# Altium PCB Slave_DA.PcbDoc
Units mil, origin at the board's own origin, x right, y up, seen from the top; angles counter-clockwise.
Board outline 6000 x 4000 mil, 2 copper layers (Top Layer, Bottom Layer); 51 components, 40 nets, 164 pads, 22 vias.
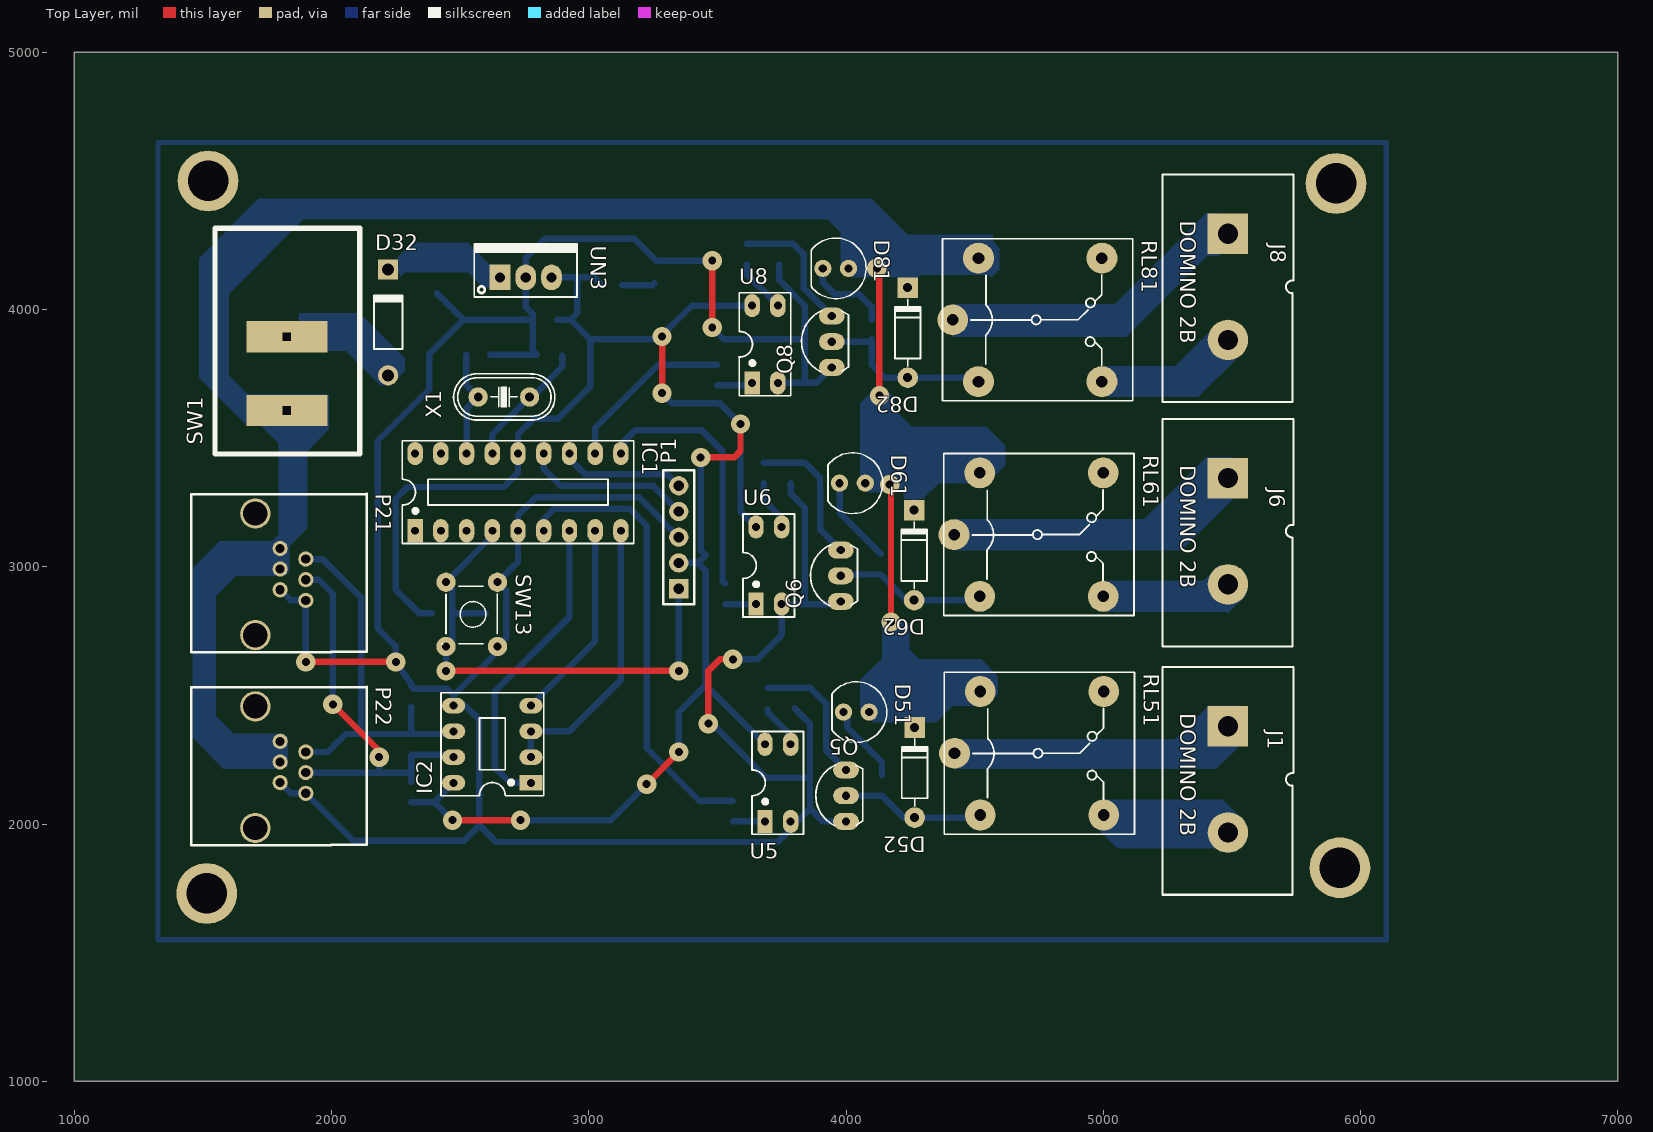
[diagram p0: Top Layer view]
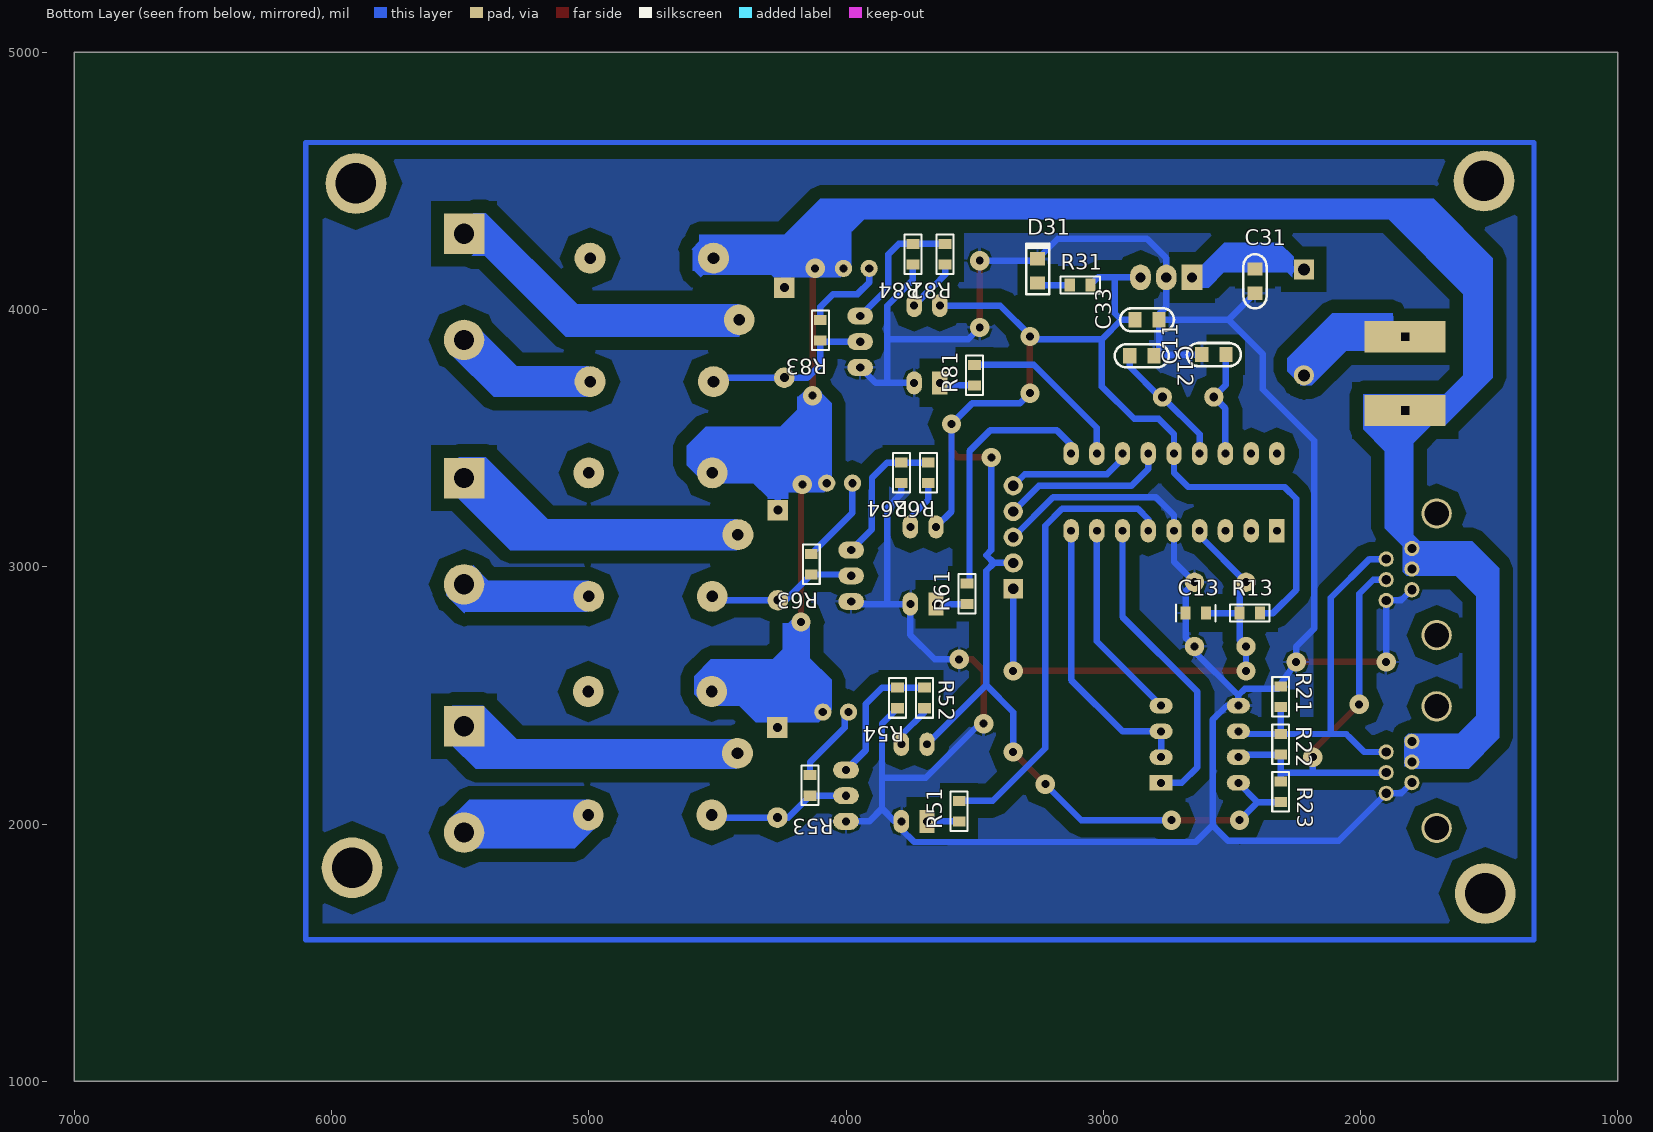
[diagram p1: Bottom Layer view, seen from below]
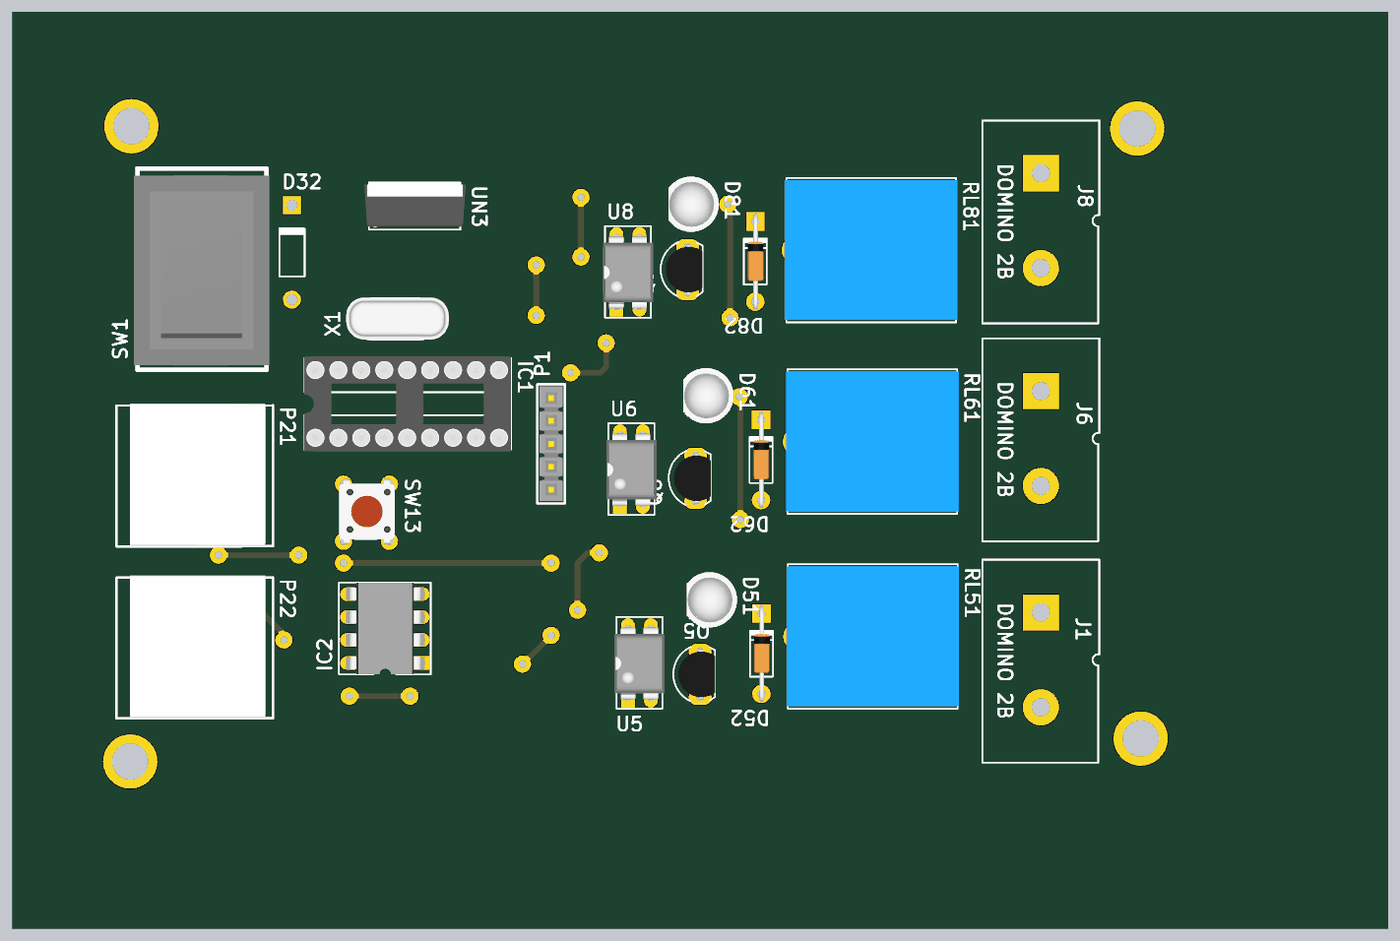
[diagram p2: 3D render of the assembled board from above, using the file's embedded part models]
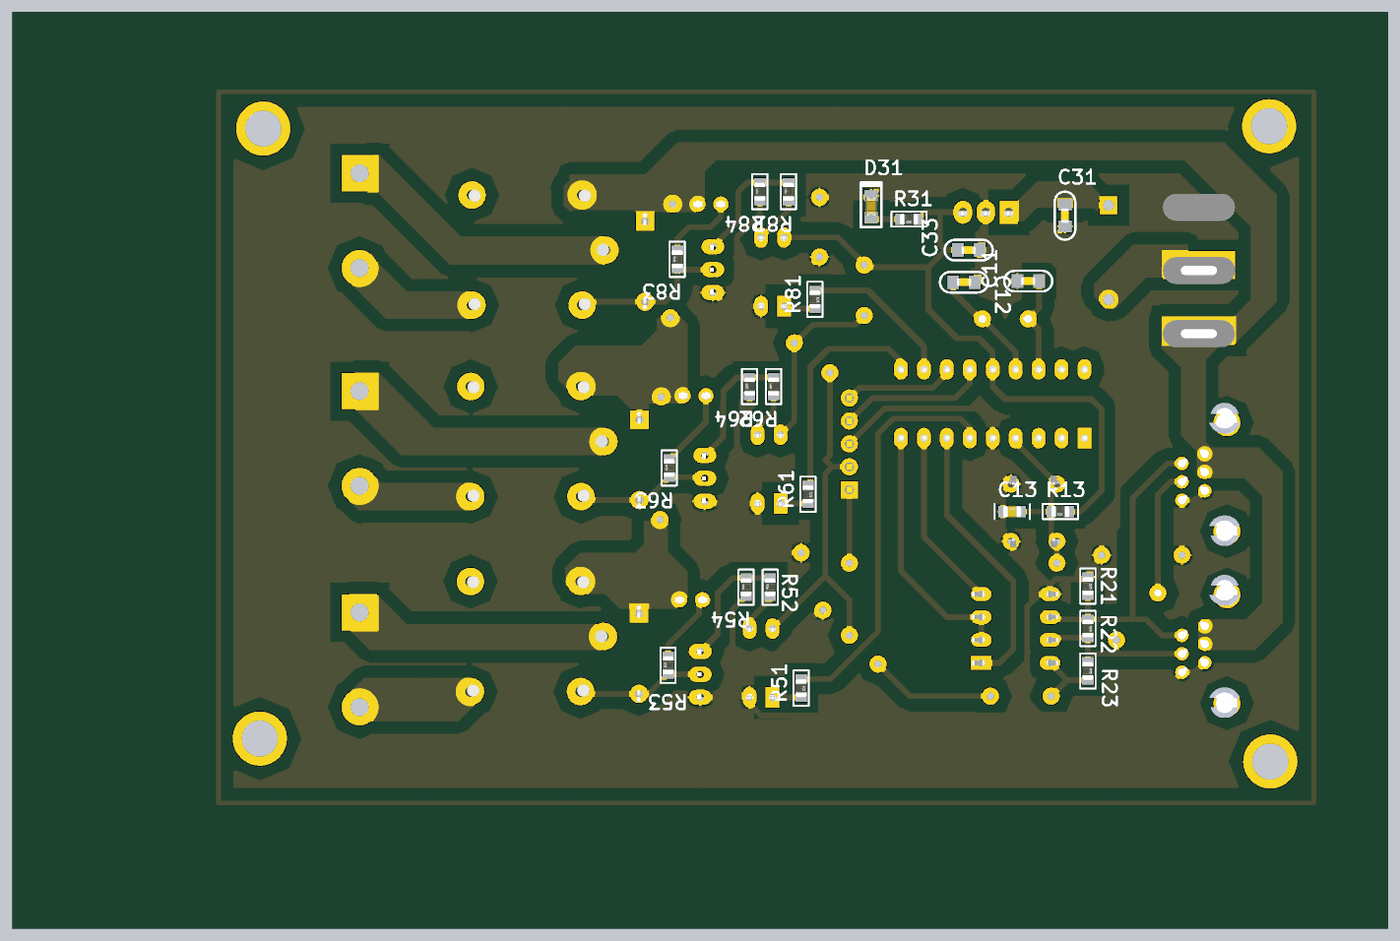
[diagram p3: 3D render of the assembled board from below, using the file's embedded part models]

## Layer stack, top to bottom
Top Solder: solder mask 0.4, Solder Resist, Dk 3.5
Top Layer: signal copper 1.4
Dielectric 1: dielectric 12.6, FR-4, Dk 4.8
Bottom Layer: signal copper 1.4
Bottom Solder: solder mask 0.4, Solder Resist, Dk 3.5

## Board outline
1000,1000 7000,1000 7000,5000 1000,5000

## Design rules (kind name [scope] priority, off if disabled: settings)
Clearance [All] p1: gap=50
PolygonConnect [All] p1: connectstyle=Relief reliefconductorwidth=10 reliefentries=4 polygonreliefangle="90 Angle" airgapwidth=10
RoutingVias [All] p1: holewidth=28 width=50 viastyle="Through Hole" minholewidth=28 minwidth=50 maxholewidth=28 maxwidth=50
SolderMaskExpansion [All] p1: expansion=4
Width [All] p1: maxlimit=30 minlimit=15 preferedwidth=20
30 further rules are at their usual default settings.

## Components (designator, comment, footprint, x,y, rotation, side; value= is the part's Value field where it differs from the comment)
C11 "Cap Non-pol" C-NP-0805 2570,3825 r0 bottom
C12 "Cap Non-pol" C-NP-0805 2850,3820 r180 bottom
C13 "Capacitor Ceramic" CAP_SMD_0805 2640,2820 r180 bottom
C31 "Cap Non-pol" C-NP-0805 2410,4110 r90 bottom
C33 "Cap Non-pol" C-NP-0805 2830,3960 r0 bottom
D31 "LED" "LED-0805 RED" 3255,4150 r90 bottom
D32 "Diode 1N4007" DO-41 2220,3950 r90 top
D51 "LED" "LED-0 5mm RED" 4040,2435 r270 top
D52 "1N4007" D1A 4266.93,2025 r270 top
D61 "LED" "LED-0 5mm RED" 4025,3325 r270 top
D62 "1N4007" D1A 4265,2870 r270 top
D81 "LED" "LED-0 5mm RED" 3960,4160 r270 top
D82 "1N4007" D1A 4240,3735 r270 top
IC1 "PIC16F628A" DIP18/W0.3 2325,3140 r0 top
IC2 "MAX485" DIP8/W0.3 2775,2160 r90 top
J1 "CON.Domino2" "DOMINO 2B" 5485,2380 r270 top
J6 "CON.Domino2" "DOMINO 2B" 5485,3345 r270 top
J8 "CON.Domino2" "DOMINO 2B" 5485,4295 r270 top
P1 "Header 5" "Header 5" 3350,2915 r90 top
P21 "Header 8" RJ11 1900,3030 r270 top
P22 "Header 8" RJ11 1900,2280 r270 top
Q5 "C1815" QTO-92 4000,2110 r90 top
Q6 "C1815" QTO-92 3980,2965 r90 top
Q8 "C1815" QTO-92 3945,3875 r90 top
R13 "RES_SMD_0805" "DIEN TRO 0805" 2430,2820 r180 bottom
R21 "RES_SMD_0805" "DIEN TRO 0805" 2310,2495 r90 bottom
R22 "RES_SMD_0805" "DIEN TRO 0805" 2310,2310 r90 bottom
R23 "RES_SMD_0805" "DIEN TRO 0805" 2310,2125 r90 bottom
R31 "RES_SMD_0805" "DIEN TRO 0805" 3090,4095 r180 bottom
R51 "RES_SMD_0805" "DIEN TRO 0805" 3560,2050 r90 bottom
R52 "RES_SMD_0805" "DIEN TRO 0805" 3695,2490 r270 bottom
R53 "RES_SMD_0805" "DIEN TRO 0805" 4140,2150 r270 bottom
R54 "RES_SMD_0805" "DIEN TRO 0805" 3800,2490 r270 bottom
R61 "RES_SMD_0805" "DIEN TRO 0805" 3530,2895 r90 bottom
R62 "RES_SMD_0805" "DIEN TRO 0805" 3680,3365 r270 bottom
R63 "RES_SMD_0805" "DIEN TRO 0805" 4135,3010 r270 bottom
R64 "RES_SMD_0805" "DIEN TRO 0805" 3785,3365 r270 bottom
R81 "RES_SMD_0805" "DIEN TRO 0805" 3500,3745 r90 bottom
R82 "RES_SMD_0805" "DIEN TRO 0805" 3615,4215 r270 bottom
R83 "RES_SMD_0805" "DIEN TRO 0805" 4100,3920 r270 bottom
R84 "RES_SMD_0805" "DIEN TRO 0805" 3740,4215 r270 bottom
RL51 "Relay 10A/12V" RL_SPDT_10A 4421.93,2275 r0 top
RL61 "Relay 10A/12V" RL_SPDT_10A 4420,3125 r0 top
RL81 "Relay 10A/12V" RL_SPDT_10A 4415,3960 r0 top
SW1 "SW_BapBenh" SW_Bapbenh 1830,3635 r0 top
SW13 "SW7" SW4 2645,2940 r270 top
U5 "TLP521-1" DIP4/W0.3 3685,2010 r0 top
U6 "TLP521-1" DIP4/W0.3 3650,2855 r0 top
U8 "TLP521-1" DIP4/W0.3 3635,3715 r0 top
UN3 "L78M05CP" QTO-220 2655,4125 r0 top
X1 "20Mhz" XT2 2670,3660 r180 top

## Footprints (in the part's own frame and the unit in brackets; to place one, negate y for a bottom-side part, rotate by r counter-clockwise, add the part's x,y. Pads: shape width x height; smd on the part's side, far side on the other; paste and mask are expansions set on the pad)
C-NP-0805 [mm] "Chip Capacitor; Non-polarized; Body 2.0 x 1.3 mm (LxW typ) [2012]"
  rect 1.3x1.5 smd: 1(-1.194,0) 2(1.194,0)
  silkscreen extent -2.67,-1.14 2.66,1.14, body extent -0.8,-0.43 0.8,0.43, height 0.79
CAP_SMD_0805 [mil] "Chip Resistor; Body 2.0 x 1.3 mm (LxW typ)"
  rect 39.37x50 smd: 1(-40,0) 2(40,0)
  silkscreen extent -77,-33 77,33, body extent -39,-25 39,25, height 31
D1A [mil] "Diode 1A, W 100mil, L 350mil"
  round 80 hole 35: 1(0,0)
  rect 80x80 hole 35: 2(-350,0)
  silkscreen extent -305,-50 -45,50, body extent -386,-33 34,36, height 84
"DIEN TRO 0805" [mil] "Chip Resistor; Body 2.0 x 1.3 mm (LxW typ)"
  rect 39.37x50 smd: 1(-40,0) 2(40,0)
  silkscreen extent -77,-33 77,33, body extent -39,-25 39,25, height 31
DIP4/W0.3 [mil] "4 PIN, W 300mil, Pin to pin 100mil"
  rect 60x90 hole 31: 1(0,0)
  oval 60x90 hole 31: 2(100,0) 3(100,300) 4(0,300)
  silkscreen extent -50,-50 150,350, body extent -59,-10 159,305, height 170
DIP8/W0.3 [mil] "8 PIN, W 300mil, Pin to pin 100mil"
  rect 60x90 hole 31: 1(0,0)
  oval 60x90 hole 31: 2(100,0) 3(200,0) 4(300,0) 5(300,300) 6(200,300) 7(100,300) 8(0,300)
  silkscreen extent -50,-50 350,350, body extent -50,-40 350,336, height 201
DIP18/W0.3 [mil] "18 PIN, W 300mil, Pin to pin 100mil"
  rect 60x90 hole 31: 1(0,0)
  oval 60x90 hole 31: 2(100,0) 3(200,0) 4(300,0) 5(400,0) 6(500,0) 7(600,0) 8(700,0) 9(800,0) 10(800,300) 11(700,300) 12(600,300) 13(500,300) 14(400,300) 15(300,300) 16(200,300) 17(100,300) 18(0,300)
  silkscreen extent -50,-50 850,350, body extent -51,-57 849,356, height 119
DO-41 [mm] "Diode, Axial; Body 5.2 x 2.7 mm (LxDia. max), Lead Dia. 0.86 mm (max)"
  round 2 hole 1.2: 1(-5.23,0)
  rect 2x2 hole 1.2: 2(5.23,0)
  silkscreen extent -2.65,-1.4 2.75,1.4
"DOMINO 2B" [mm]
  rect 4x4 hole 2: 1(0,0)
  round 4 hole 2: 2(10.5,0)
  silkscreen extent -5.84,-6.48 16.64,6.48
"Header 5" [mil] "Connector; Header; 5 Position; Solder Pad 35mil"
  rect 75x75 hole 40: 1(0,0)
  round 75 hole 40: 2(100,0) 3(200,0) 4(300,0) 5(400,0)
  silkscreen extent -60,-60 460,60, body extent -50,-50 450,50, height 83
"LED-0 5mm RED" [mil] "Typical LED; RED; 2 Leads; Solder Pad 35mil"
  round 67 hole 32: 1(0,50) 2(0,-50)
  silkscreen extent -118,-96 118,118, body extent -118,-96 119,117, height 345
"LED-0805 RED" [mm] "Chip LED; RED; Body 2.0 x 1.3 mm (LxW typ) [2012]"
  rect 1.3x1.5 smd: 1(-1.204,0) 2(1.204,0)
  silkscreen extent -2.29,-1.14 2.67,1.14, body extent -1.01,-0.63 1.01,0.62, height 1.1
QTO-92 [mil] "TO-92"
  oval 66x100 hole 32: 1(-100,0) 2(0,0) 3(100,0)
  silkscreen extent -117,-65 120,118, body extent -109,-66 109,95, height 245
QTO-220 [mil] "TO-220 - 1-2-3"
  rect 80x100 hole 39: 1(0,0)
  oval 80x100 hole 39: 2(100,0) 3(200,0)
  silkscreen extent -100,-76 300,130, body extent -119,-64 322,121, height 755
RJ11 [mm] "DIP 20, 20 PIN, W 300mil, Pin to pin 100mil"
  round 1.5 hole 0.9: 1(0,0) 2(2.04,0) 3(4.08,0) 4(-1.05,-2.53) 5(0.99,-2.53) 6(3.03,-2.53)
  round 3 hole 2.4: 7(-4.5,-4.98) 8(7.51,-4.98)
  silkscreen extent -6.43,-11.3 9.2,6.03, body extent -6.71,-9.8 9.11,5.19, height 12.87
RL_SPDT_10A [mil] "Relay SPDT, 5 pin, 10A,W 650mil, L 800mil, H 800mil"
  round 120 hole 45: 1(0,0) 2(580,240) 3(580,-240) 4(100,-240) 5(100,240)
  silkscreen extent -40,-315 700,315, body extent -46,-304 706,306, height 602
SW4 [mil] "SW button 4pin, 250 x250 mil"
  round 75 hole 31: 1(0,0) 2(250,-200) 3(250,0) 4(0,-200)
  silkscreen extent 15,-215 240,0, body extent -36,-220 276,24, height 276
SW_Bapbenh [mm] "Typical LED; GREEN; RED; 2 Leads; Solder Pad 35mil"
  rect 8x3.1 hole 0.8 square: 1(-0.1,-0.7) 2(-0.1,6.6)
  silkscreen extent -7.2,-5 7.1,17.3, body extent -7.6,-4.55 7.4,16.55, height 16.72
XT2 [mil] "Footpin for Crystal 2 pin"
  round 75 hole 34: 1(-100,0) 2(100,0)
  silkscreen extent -198,-90 195,90, body extent -233,-93 213,90, height 138

## Part data
C11 C12 C31 C33: "Non-polarized Capacitor"
C13: library part CapSMD, "Capacitor"
D31 D51 D61 D81: "Typical LED"
D32: "1 Amp General Purpose Rectifier"
D52 D62 D82: library part D1A, "Diode 1A"
IC2: "RS232 - RS485 (Same sn75176)"
J1 J6 J8: "2 pins Domino Header"
P1: "Header, 5-Pin"
P21 P22: "Header, 8-Pin"
Q5 Q6 Q8: "NPN 600mW, ECB"
R13 R21 R22 R23 R31 R51 R52 R53 R54 R61 R62 R63 R64 R81 R82 R83 R84: "RES_0805"
RL51 RL61 RL81: library part "Relay 1", "Relay SPDT,10A - 12VDC 5 Pin"
SW13: library part SW4, "Switch button 4 pin"
U5 U6 U8: "Single Opto"
UN3: "Positive Voltage Regulator"
X1: library part XT2, "Crystal For all Crystal 2pin."

## Free pads (board coordinates)
  round 236.22 hole 157.48: 2(1515,1730) 2(1520,4500) 2(5905,4490) 2(5920,1830)

## Via types
v1: diameter 75, hole 31, Top Layer to Bottom Layer, 22 vias

## Nets (pads, with @x,y where several pads share a name; then routed paths per layer and width w, separated by ;. In a path a pad name is that pad's centre, name@x,y a point inside that pad or via, vN(x,y) a via of type N, cw(c..) or ccw(c..) an arc to the next point about the centre after c; other vN are vias at no path point)
12V: D51.1 D52.2 D61.1 D62.2 D81.1 D82.2 P21.4 P21.5 P22.4 P22.5 RL51.5 RL61.5 RL81.5 SW1.1 | length 8855.5
  Top Layer w25: v1(4120,4160) 4130,4150 v1(4130,3665) ; v1(4170,3320) 4175,3315 v1(4175,2785)
  Bottom Layer w25: P22.5 P22.4 1608.66,2321.34 1530,2400 1530,2905 1616.02,2991.02 P21.5 P21.4 1855,3125.94 1855,3578.5 SW1.1 1657.56,3607.44 1545,3720 1545,4060 1865,4380 4030,4380 4120,4290 v1(4120,4160) ; D81.1 v1(4120,4160) ; v1(4130,3665) 4115,3665 4075,3625 D61.1 4240,3325 4265,3300 ; v1(4175,2785) 4175,2650 4090,2565 D51.1 4206.93,2435 D52.2 4406.93,2515 RL51.5 ; D82.2 D82.2@4240,4115 ; D62.2 4265,3300 ; RL81.5 4310,4200 4240,4130 D82.2@4240,4115 ; RL61.5 4330,3365 4265,3300 ; v1(4120,4160) 4195,4160 D82.2@4240,4115
A: IC2.6 P21.1 P22.1 R21.1 R22.2 | length 1506.1
  Bottom Layer w25: P22.1 1985,2280 2045,2340 ; P21.1 1965,3030 2115,2880 2115,2350 ; 2055,2350 R22.2 ; R21.1 R22.2 ; IC2.6 2465,2350 R22.2
B: IC2.7 P21.2 P22.2 R22.1 R23.2 | length 1583.9
  Top Layer w25: v1(2005,2465) 2185,2285 v1(2185,2260)
  Bottom Layer w25: P22.2 2185,2199.68 ; P21.2 1950.32,2949.68 2005,2895 v1(2005,2465) ; v1(2185,2260) 2185,2199.68 ; R23.2 2310,2205 ; IC2.7 2465,2270 R22.1 2310,2205 ; 2185,2199.68 2304.68,2199.68 2310,2205
GND: C11.2 C12.2 C13.1 C31.1 C33.1 D31.2 IC1.5 IC2.5 P1.3 P21.3 P21.6 P22.3 P22.6 Q5.1 Q6.1 Q8.1 R21.2 R54.2 R64.2 R84.2 SW13.1 SW13.3 U5.2 U6.2 U8.2 UN3.2 | length 12504.5
  Top Layer w25: v1(1900,2630) v1(2250,2630) ; v1(3465,2390) 3465,2595 3510,2640 v1(3560,2640) ; v1(3480,3930) v1(3480,4190)
  Bottom Layer w25: P22.6 1841.73,2119.37 P22.3 2084.37,1935 2515,1935 2575,1995 ; P21.6 1841.73,2869.37 P21.3 v1(1900,2630) ; C31.1 2513,3960 ; C11.2 2798,3825 2783,3840 C33.1 ; P1.3 3195,3270 2795,3270 2725,3200 IC1.5 2725,3020 SW13.1 2680,2905 C13.1 2680,2725 SW13.3 2645,2670 2475,2500 ; v1(3465,2390) 3480,2390 3690,2180 3860,2180 ; v1(3480,3930) 3525,3885 3840,3885 ; v1(3480,4190) 3262.4,4190 D31.2 3177.4,4275 2830,4275 2755,4200 UN3.2 2755,4010 2783,3982 C33.1 ; v1(3560,2640) 3655,2640 3750,2735 U6.2 3840,2855 ; U8.2 3840,3715 ; R84.2 3740,4115 3840,4015 3840,3885 ; R64.2 3785,3285 3840,3230 3840,2855 ; R54.2 3860,2390 3860,2180 ; Q8.1 3885,3715 3840,3715 ; Q6.1 3970,2855 3840,2855 ; Q5.1 3910,2010 3860,2060 ; 2475,2500 2450,2525 2320,2525 R21.2 2310,2545 v1(2250,2630) 2250,2690 2180,2760 2180,3490 2380,3690 2380,3827 2513,3960 ; 2475,2500 IC2.5 2520,2460 2575,2405 2575,1995 ; 2513,3960 C33.1 ; 2575,1995 2640,1930 3735,1930 3785,1980 U5.2 3810,2010 3860,2060 ; 3840,3715 3840,3885 ; 3860,2060 3860,2180
MCLR: C13.2 IC1.4 P1.1 R13.1 SW13.2 SW13.4 | length 1995.3
  Top Layer w25: v1(2445,2595) v1(3350,2595)
  Bottom Layer w25: v1(2445,2595) SW13.2 2470,2715 R13.1 ; C13.2 R13.1 ; IC1.4 2625,3120 SW13.4 2445,2935 2470,2910 R13.1 ; v1(3350,2595) P1.1
NetC31_2: C31.2 D32.2 UN3.1 | length 448.7
  Bottom Layer w25: D32.2 2408.91,4155.91 C31.2 2623,4157 UN3.1
NetD31_1: D31.1 R31.1 | length 128.1
  Bottom Layer w25: R31.1 3247.4,4095 D31.1
NetD32_1: D32.1 SW1.2 | length 456.4
  Bottom Layer w25: SW1.2 2069.25,3894.84 D32.1
NetD51_2: D51.2 R53.1 | length 307.1
  Bottom Layer w25: D51.2 4005,2420 4005,2375 4140,2240 R53.1
NetD52_1: D52.1 Q5.2 R53.2 RL51.4 | length 561.3
  Bottom Layer w25: Q5.2 R53.2 4225,2025 D52.1 4511.93,2025 RL51.4
NetD61_2: D61.2 R63.1 | length 341.3
  Bottom Layer w25: D61.2 3975,3210 R63.1
NetD62_1: D62.1 Q6.2 R63.2 RL61.4 | length 589.7
  Bottom Layer w25: Q6.2 3985,2970 R63.2 4235,2870 D62.1 4505,2870 RL61.4
NetD81_2: D81.2 R83.1 | length 334.4
  Bottom Layer w25: D81.2 3910,4105 3955,4060 4050,4060 4100,4010 R83.1
NetD82_1: D82.1 Q8.2 R83.2 RL81.4 | length 696.1
  Bottom Layer w25: Q8.2 4090,3875 R83.2@4100,3885 ; R83.2 4100,3785 4150,3735 D82.1 4500,3735 RL81.4
NetJ1_1: J1.1 RL51.1 | length 1106.6
  Bottom Layer w25: RL51.1 5380,2275 J1.1
NetJ1_2: J1.2 RL51.3 | length 511.4
  Bottom Layer w25: RL51.3 5416.61,2035 J1.2
NetJ6_1: J6.1 RL61.1 | length 1156.1
  Bottom Layer w25: RL61.1 5265,3125 J6.1
NetJ6_2: J6.2 RL61.3 | length 504.3
  Bottom Layer w25: RL61.3 5438.39,2885 J6.2
NetJ8_1: J8.1 RL81.1 | length 1208.8
  Bottom Layer w25: RL81.1 5040,3960 5375,4295 J8.1
NetJ8_2: J8.2 RL81.3 | length 556.9
  Bottom Layer w25: RL81.3 5323.39,3720 J8.2
NetQ5_3: Q5.3 R52.1 R54.1 | length 543
  Bottom Layer w25: R52.1 R54.1 3860,2530 3924,2466 3924,2286 Q5.3
NetQ6_3: Q6.3 R62.1 R64.1 | length 558
  Bottom Layer w25: R62.1 R64.1 3840,3405 3899,3346 3899,3296.66 3900,3295.66 3900,3145 Q6.3
NetQ8_3: Q8.3 R82.1 R84.1 | length 522.1
  Bottom Layer w25: R82.1 R84.1 3795,4255 3835,4215 3835,4085 Q8.3
NetR51_1: R51.1 U5.1 | length 125
  Bottom Layer w25: R51.1 U5.1
NetR52_2: R52.2 U5.3 | length 172.3
  Bottom Layer w25: R52.2@3695,2445 3695,2435 3785,2345 U5.3
NetR61_1: R61.1 U6.1 | length 120
  Bottom Layer w25: R61.1 U6.1
NetR62_2: R62.2 U6.3 | length 199
  Bottom Layer w25: R62.2 3680,3260 3750,3190 U6.3
NetR81_1: R81.1 U8.1 | length 139.1
  Bottom Layer w25: R81.1 3625,3705 U8.1
NetR82_2: R82.2 U8.3 | length 211.7
  Bottom Layer w25: R82.2 3615,4135 3657.5,4092.5 3660.89,4092.5 3697.5,4055.89 3697.5,4052.5 U8.3
PGC: IC1.12 P1.5 | length 488.5
  Bottom Layer w25: IC1.12 2925,3420 2985,3360 3305,3360 P1.5
PGD: IC1.13 P1.4 | length 653.3
  Bottom Layer w25: IC1.13 2825,3380 2890,3315 3250,3315 P1.4
RELAY1: IC1.6 R51.2 | length 1773.4
  Bottom Layer w25: IC1.6 2825,3185 2865,3225 3160,3225 3225,3160 3225,2295 3430,2090 R51.2
RELAY2: IC1.10 R61.2 | length 1005.1
  Bottom Layer w25: IC1.10 3125,3475 3180,3530 3440,3530 3520,3450 3520,2945 R61.2
RELAY3: IC1.11 R81.2 | length 676.5
  Bottom Layer w25: IC1.11 3025,3540 3270,3785 R81.2
RXD: IC1.7 IC2.1 | length 1205
  Bottom Layer w25: IC2.1 2695,2160 2635,2220 2635,2515 2925,2805 IC1.7
SEC: IC1.9 IC2.2 IC2.3 | length 1112.8
  Bottom Layer w25: IC2.2 IC2.3 2925,2360 3125,2560 IC1.9
TXD: IC1.8 IC2.4 | length 783.6
  Bottom Layer w25: IC2.4 3025,2710 IC1.8
VCC: C33.2 IC1.14 IC2.8 P1.2 R13.2 R23.1 R31.2 U5.4 U6.4 U8.4 UN3.3 | length 7125
  Top Layer w25: v1(2470,2015) v1(2735,2015) ; v1(3225,2155) v1(3350,2280) ; v1(3285,3675) v1(3285,3895) ; v1(3435,3425) 3565,3425 3590,3450 v1(3590,3555)
  Bottom Layer w25: R23.1 2400,2085 ; R13.2 2340,2820 2250,2910 2250,3265 2295,3310 2670,3310 2725,3365 IC1.14 2725,3515 2785,3575 2880,3575 3005,3700 3005,3885 ; v1(2470,2015) 2400,2085 ; IC2.8 2400,2085 ; v1(2735,2015) 3085,2015 v1(3225,2155) ; UN3.3 2955,4125 ; C33.2 2930,3960 ; R31.2 3020,4125 2955,4125 ; v1@3270,3885 3005,3885 ; v1@3282.5,3897.5 3400,4015 U8.4 ; v1(3285,3675) 3325,3635 3510,3635 v1(3590,3555) 3590,3215 U6.4 ; v1(3350,2280) 3350,2435 3455,2540 ; P1.2 3425,3015 ; v1(3435,3425) 3435,3065 3455,3045 3425,3015 ; U5.4 3455,2540 ; 2930,3960 2955,3985 2955,4125 ; 2930,3960 3005,3885 ; 3425,3015 3455,2985 3455,2540
XT1: C11.1 IC1.16 X1.2 | length 423.1
  Bottom Layer w25: C11.1 2523,3707 X1.2 2525,3615 IC1.16
XT2: C12.1 IC1.15 X1.1 | length 498.5
  Bottom Layer w25: IC1.15 2625,3515 X1.1 2780,3660 2897,3777 C12.1
pads on no net: IC1.1 IC1.2 IC1.3 IC1.17 IC1.18 P21.7 P21.8 P22.7 P22.8 RL51.2 RL61.2 RL81.2
copper on no net: | length 15750
  Bottom Layer w20: 1325,1550 6100,1550 6100,4650 1325,4650 1325,1550

## Polygon pours and split planes (outlines as drawn)
GND on Bottom Layer "G2" (solid, remove dead copper, pour order 2): 1360,4620 1360,1600 1365,1595 3685,1595 6075,1595 6075,4630

## Other copper
Bottom Layer:
  region net NetJ1_2: 5000,2095 5465,2095 5550,2010 5445,1905 5055,1905 4945,2015
  region net NetJ1_1: 4420,2330 5280,2330 5410,2460 5530,2460 5530,2305 5440,2215 4425,2215
  region net NetJ6_2: 5000,2945 5390,2945 5450,3005 5555,2900 5555,2890 5485,2820 5480,2825 5005,2825
  region net NetJ6_1: 4425,3185 5160,3185 5400,3425 5505,3425 5505,3265 5305,3065 4425,3065
  region net NetJ8_2: 5000,3780 5280,3780 5425,3925 5530,3820 5370,3660 5000,3660
  region net NetJ8_1: 4415,4020 5045,4020 5400,4375 5450,4375 5450,4215 5455,4210 5405,4210 5090,3895 4415,3895
  region net 12V: 1795,2215 1580,2215 1460,2335 1460,2995 1565,3100 1815,3100 1835,3080 1835,2980 1820,2965 1630,2965 1550,2885 1550,2420 1620,2350 1815,2350 1830,2335 1830,2225
  region net 12V: 1765,3095 1795,3125 1795,3480 1725,3550 1670,3550 1670,3665 1675,3670 1990,3670 1990,3535 1905,3450 1905,3150 1835,3080
  region net 12V: 1670,3550 1485,3735 1485,4200 1715,4430 4100,4430 4240,4290 4570,4290 4570,4265 4600,4235 4595,4230 4595,4150 4590,4150 4565,4125 4555,4135 4290,4135 4280,4125 4020,4125 3980,4165 3980,4305 3975,4305 3930,4350 1890,4350 1600,4060 1600,3745 1675,3670
  region net 12V: 4095,3680 4095,3675 4055,3635 4055,3320 4085,3290 4225,3290 4225,3265 4305,3265 4305,3270 4360,3325 4550,3325 4620,3395 4620,3470 4545,3545 4255,3545 4190,3610 4190,3660 4185,3660 4165,3680
  region net 12V: 4140,2780 4140,2645 4055,2560 4055,2445 4105,2395 4350,2395 4415,2460 4545,2460 4590,2505 4590,2575 4525,2640 4285,2640 4245,2680 4245,2780 4225,2780 4205,2800 4200,2795 4145,2795
  region net NetD32_1: 1860,3840 2055,3840 2190,3705 2235,3705 2235,3710 2285,3760 2285,3810 2110,3985 1875,3985
  region net NetC31_2: 2260,4205 2315,4260 2530,4260 2615,4175 2615,4085 2590,4085 2525,4150 2290,4150 2265,4125

## Text inside footprints (layer, text, board x,y; h text height)
J1: Top Overlay "DOMINO 2B" at 5300,2430 h60 r270
J6: Top Overlay "DOMINO 2B" at 5300,3395 h60 r270
J8: Top Overlay "DOMINO 2B" at 5300,4345 h60 r270